# Altium PCB Controller-Board-Rev2_Panelized.PcbDoc (part 2 of 2)
Units mm, origin at the board's own origin, x right, y up, seen from the top; angles counter-clockwise.
Board outline 31 x 50 mm, 4 copper layers (Top Layer, Mid Layer 1, Mid Layer 2, Bottom Layer), stack 1.56 mm thick; 94 components, 55 nets, 446 pads, 226 vias.
Unrouted connection lines stored in the file: 54.
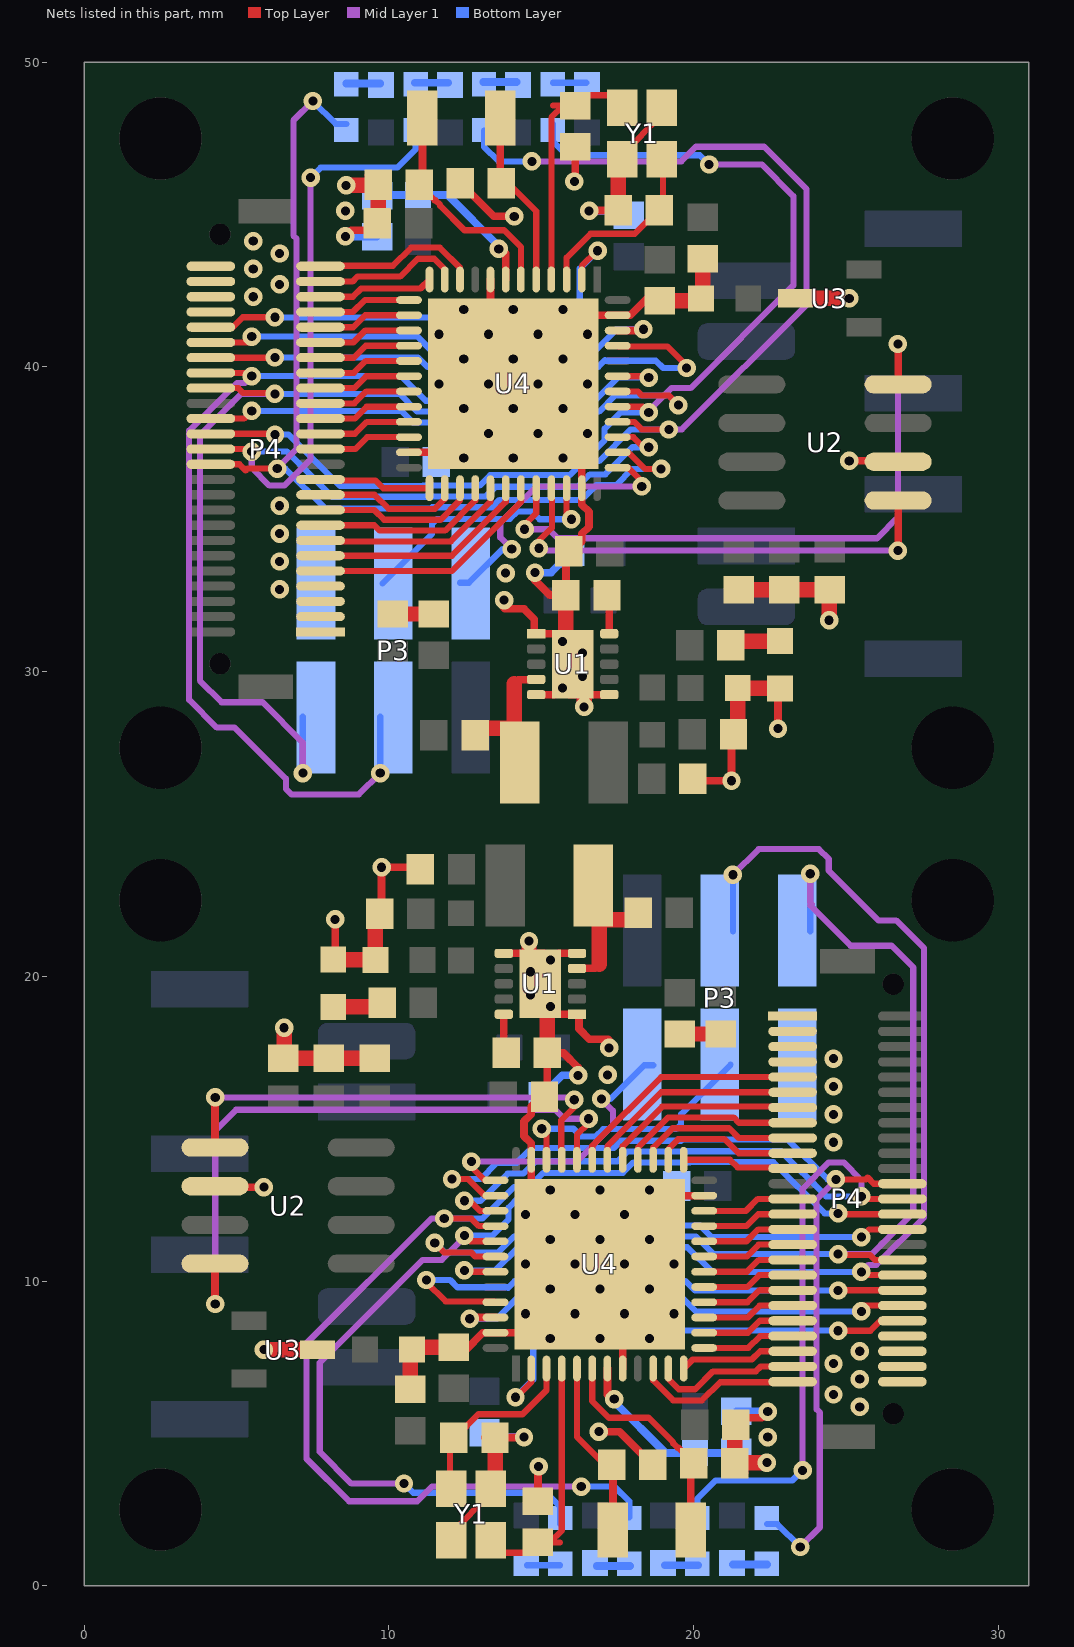
[diagram p4: the nets of this part, all layers, seen from the top]

## Via types
v1: diameter 0.605, hole 0.3, Top Layer to Bottom Layer, tented both sides, 174 vias
v2: diameter 0.605, hole 0.3, Top Layer to Bottom Layer, tented bottom, 52 vias

## Nets (pads, with @x,y where several pads share a name; then routed paths per layer and width w, separated by ;. In a path a pad name is that pad's centre, name@x,y a point inside that pad or via, vN(x,y) a via of type N, cw(c..) or ccw(c..) an arc to the next point about the centre after c; other vN are vias at no path point) (continued)
GND: C2.1 C3.1 C4.1 C5.1 C6.2 C7.1 C8.1 C9.1 C11.1 C12.1 C13.1 C14.1 C15.1 C16.1 C17.1 C18.1 C19.1 C20.1 C21.1 C22.1 P3.3 P4.1 P4.2 P4.3 P4.4 P4.26 P4.27 P4.28 P4.29 R3.1 R4.1 R10.1 U1.1 U1.5 U1.6 U1.11 U2.2 U3.1 U4. U4.8 U4.23 U4.35 U4.47 Y1.2 Y1.4 | length 113.7
  Top Layer w0.203: Y1.2@11.713,1.486 Y1.2@11.713,1.727 ; Y1.2@12.043,1.727 Y1.4@13.343,3.027 ; Y1.4@17.657,46.973 Y1.2@18.957,48.273 ; Y1.2@19.287,48.273 Y1.2@19.287,48.514
  Top Layer w0.254: U2.2@4.319,13.081 v1(5.896,13.081) ; R4.1@8.232,20.546 v1(8.232,21.869) ; v1@8.568,44.286 8.771,44.488 9.264,44.488 9.621,44.844 C19.1@9.621,44.883 ; C14.1@9.328,46.295 C14.1@9.661,46.295 ; R3.1@9.566,20.546 R3.1@9.653,20.633 ; C12.1@9.757,22.124 v1(9.757,23.583) 11.049,23.583 C11.1@11.05,23.581 ; U4.23@10.655,37.198 U4.@11.83,37.198 ; C18.1@12.119,7.748 12.526,7.748 13.08,8.302 U4.47@13.495,8.302 U4.@14.67,8.302 ; C13.1@12.302,46.32 12.182,46.2 12.959,45.422 13.436,44.945 v1(14.113,44.945) ; C2.1@13.15,4.863 14.126,4.863 ; U4.@13.33,40.198 U4.8@13.33,42.873 ; U1.6@13.77,20.755 15.085,20.755 v2(15.307,20.533) ; v1(13.776,32.347) 13.776,32.095 13.81,32.061 14.427,32.061 14.764,31.724 14.764,31.31 U1.1@14.83,31.245 U1.11@15.541,31.245 ; U4.@14.67,12.802 14.67,12.838 U4.35@14.67,13.977 14.67,14.52 14.433,14.756 14.433,15.238 14.67,15.475 14.67,15.73 15.194,16.254 C6.2@15.194,17.485 15.727,17.485 16.209,17.004 v1(16.209,16.75) ; v1(14.791,33.25) 14.791,32.996 15.273,32.515 C6.2@15.806,32.515 15.806,33.746 16.33,34.27 16.33,34.525 16.567,34.762 16.567,35.244 16.33,35.48 U4.35@16.33,36.023 16.33,37.162 U4.@16.33,37.198 ; U1.5@14.83,29.245 U1.11@15.421,29.245 ; C3.1@14.888,2.769 v1@14.888,4.05 ; U1.11@15.459,18.755 U1.1@16.17,18.755 16.236,18.69 16.236,18.276 16.573,17.939 17.19,17.939 17.224,17.905 v1(17.224,17.653) ; U1.11@15.579,20.755 U1.5@16.17,20.755 ; v2(15.693,29.467) 15.915,29.245 U1.6@17.23,29.245 ; v1@16.112,45.95 C3.1@16.112,47.231 ; U4.@16.33,41.698 U4.47@17.505,41.698 17.92,41.698 18.474,42.252 C18.1@18.881,42.252 ; 16.874,45.137 C2.1@17.85,45.137 ; v1(16.887,5.055) 17.564,5.055 18.041,4.578 18.818,3.8 C13.1@18.698,3.68 ; U4.8@17.67,7.127 U4.@17.67,9.802 ; U4.@19.17,12.802 U4.23@20.345,12.802 ; C11.1@19.95,26.419 19.951,26.417 v1(21.243,26.417) C12.1@21.243,27.876 ; C14.1@21.339,3.705 C14.1@21.672,3.705 ; R3.1@21.347,29.367 R3.1@21.434,29.454 ; C19.1@21.379,5.117 21.379,5.156 21.736,5.512 22.229,5.512 v1(22.431,5.715) ; v1(22.768,28.131) R4.1@22.768,29.454 ; v1(25.104,36.919) U2.2@26.681,36.919
  Top Layer w0.508: v1(5.896,7.747) U3.1@7.656,7.747 ; C9.1@6.531,17.312 C8.1@8.029,17.312 C7.1@9.528,17.312 ; C9.1@6.556,17.337 v1(6.556,18.313) ; R4.1@8.232,20.546 R3.1@9.54,20.546 ; v1(8.594,45.961) C14.1@9.62,45.961 ; R3.1@9.553,20.533 C12.1@9.553,21.92 ; C19.1@9.646,44.87 C14.1@9.646,45.987 ; C5.1@10.118,31.893 C4.1@11.464,31.893 ; C17.1@10.696,6.441 R10.1@10.697,7.76 ; R10.1@10.761,7.824 C18.1@12.119,7.824 ; Y1.4@13.48,3.323 C2.1@13.48,4.863 ; v1(14.595,21.158) 14.595,20.244 U1.11@15.027,19.812 ; C6.2@15.194,17.485 U1.11@15.194,19.531 ; U1.11@15.806,30.469 C6.2@15.806,32.515 ; U1.11@15.973,30.188 16.405,29.756 v1(16.405,28.842) ; C2.1@17.52,45.137 Y1.4@17.52,46.677 ; C18.1@18.881,42.176 R10.1@20.239,42.176 ; C4.1@19.536,18.107 C5.1@20.882,18.107 ; R10.1@20.303,42.24 C17.1@20.303,43.559 ; C14.1@21.354,4.013 C19.1@21.354,5.13 ; C14.1@21.38,4.039 v1(22.406,4.039) ; C12.1@21.447,28.08 R3.1@21.447,29.467 ; R3.1@21.46,29.454 R4.1@22.768,29.454 ; C7.1@21.472,32.688 C8.1@22.971,32.688 C9.1@24.469,32.688 ; U3.1@23.344,42.253 v1(25.104,42.253) ; v1(24.444,31.687) C9.1@24.444,32.663
  Bottom Layer w0.254: v1@8.568,44.286 C15.1@9.595,44.286 ; C20.1@11.682,37.009 v2(12.455,37.009) ; C22.1@13.273,4.888 13.284,4.877 v1(14.43,4.877) ; v1(14.791,33.25) 15.314,33.25 15.577,33.513 15.577,33.961 C21.1@16.021,33.961 ; C21.1@14.979,16.039 15.423,16.039 15.423,16.487 15.686,16.75 v1(16.209,16.75) ; v1(16.57,45.123) 17.716,45.123 C22.1@17.727,45.112 ; v2(18.545,12.991) C20.1@19.318,12.991 ; C15.1@21.405,5.714 v1(22.431,5.715)
  other v1: 14.913,3.912 22.431,4.877 25.454,5.867 24.59,6.274 25.454,6.782 24.59,7.29 25.454,7.696 16.92,12.991 24.59,14.554 24.59,15.469 24.59,16.383 17.173,16.764 24.59,17.297 6.41,32.703 13.827,33.236 6.41,33.617 6.41,34.531 6.41,35.446 14.08,37.009 5.546,42.304 6.41,42.71 5.546,43.218 6.41,43.726 5.546,44.133 8.569,44.285 8.569,45.123 16.087,46.088
  other v2: 15.294,8.114 16.92,8.114 18.545,8.114 14.481,8.927 16.107,8.927 17.733,8.927 19.358,8.927 15.294,9.74 16.92,9.74 18.545,9.74 14.481,10.552 16.107,10.552 17.733,10.552 19.358,10.552 15.294,11.365 16.92,11.365 18.545,11.365 14.481,12.178 16.107,12.178 17.733,12.178 15.294,12.991 15.307,19.009 14.646,19.39 14.646,20.152 16.354,29.848 16.354,30.61 15.693,30.991 15.706,37.009 13.267,37.822 14.893,37.822 16.519,37.822 12.455,38.635 14.08,38.635 15.706,38.635 11.642,39.448 13.267,39.448 14.893,39.448 16.519,39.448 12.455,40.26 14.08,40.26 15.706,40.26 11.642,41.073 13.267,41.073 14.893,41.073 16.519,41.073 12.455,41.886 14.08,41.886 15.706,41.886
NetC10_1: C10.1 R4.2 | length 2.9
  Top Layer w0.508: R4.2@8.169,18.996 C10.1@9.64,18.996 ; C10.1@21.36,31.004 R4.2@22.831,31.004
NetD1_1: D1.1 R6.1 | length 2.2
  Bottom Layer w0.203: R6.1@14.526,0.672 D1.1@15.617,0.672 ; D1.1@15.383,49.328 R6.1@16.474,49.328
NetD2_1: D2.1 R7.1 | length 2.2
  Bottom Layer w0.254: D2.1@13.09,49.353 R7.1@14.182,49.353 ; R7.1@16.818,0.647 D2.1@17.91,0.647
NetD3_1: D3.1 R8.1 | length 2.2
  Bottom Layer w0.254: D3.1@10.855,49.328 R8.1@11.947,49.328 ; R8.1@19.053,0.672 D3.1@20.145,0.672
NetD4_1: D4.1 R9.1 | length 2.2
  Bottom Layer w0.254: D4.1@8.594,49.302 R9.1@9.712,49.302 ; R9.1@21.288,0.698 D4.1@22.406,0.698
NRST: C15.2 R5.1 U4.7 | length 11.3
  Top Layer w0.254: U4.7@13.83,42.873 v1@13.83,43.736 ; v1@17.17,6.264 U4.7@17.17,7.127
  Bottom Layer w0.254: C15.2@9.61,45.621 9.634,45.645 R5.1@10.956,45.645 11.926,45.645 13.605,43.966 v1(13.605,43.879) ; v1(17.395,6.121) 17.395,6.034 19.074,4.355 R5.1@20.044,4.355 21.366,4.355 C15.2@21.39,4.379
PA0: P4.25 U4.10 | length 11
  Top Layer w0.203: P4.25@7.752,43.306 7.767,43.321 10.131,43.321 10.727,43.918 11.667,43.918 12.33,43.255 U4.10@12.33,42.873 ; U4.10@18.67,7.127 18.67,6.745 19.333,6.082 20.273,6.082 20.87,6.679 23.233,6.679 P4.25@23.248,6.694
PA1: P4.24 U4.11 | length 9.7
  Top Layer w0.203: P4.24@7.752,42.806 8.803,42.806 8.962,42.966 10.365,42.966 10.951,43.552 11.487,43.552 11.83,43.209 U4.11@11.83,42.873 ; U4.11@19.17,7.127 19.17,6.791 19.513,6.448 20.049,6.448 20.635,7.035 22.038,7.035 22.197,7.194 P4.24@23.248,7.194
PA2/USART2_TX: P4.23 U4.12 | length 7.6
  Top Layer w0.203: P4.23@7.752,42.306 8.816,42.306 9.086,42.577 11.034,42.577 U4.12@11.33,42.873 ; U4.12@19.67,7.127 19.966,7.423 21.914,7.423 22.184,7.694 P4.23@23.248,7.694
PA3/USART2_RX: P4.22 U4.13 | length 6.1
  Top Layer w0.203: P4.22@7.752,41.806 8.819,41.806 9.21,42.198 U4.13@10.655,42.198 ; U4.13@20.345,7.802 21.79,7.802 22.181,8.194 P4.22@23.248,8.194
PA4/SPI1_NSS: P4.21 U4.14 | length 6.1
  Top Layer w0.203: P4.21@7.752,41.306 8.827,41.306 9.218,41.698 U4.14@10.655,41.698 ; U4.14@20.345,8.302 21.782,8.302 22.173,8.694 P4.21@23.248,8.694
PA5/SPI1_SCK: P4.20 U4.15 | length 6.1
  Top Layer w0.203: P4.20@7.752,40.806 8.835,40.806 9.226,41.198 U4.15@10.655,41.198 ; U4.15@20.345,8.802 21.774,8.802 22.165,9.194 P4.20@23.248,9.194
PA6/SPI1_MISO: P4.19 U4.16 | length 6.1
  Top Layer w0.203: P4.19@7.752,40.306 8.843,40.306 9.234,40.698 U4.16@10.655,40.698 ; U4.16@20.345,9.302 21.766,9.302 22.157,9.694 P4.19@23.248,9.694
PA7/SPI1_MOSI: P4.18 U4.17 | length 6.1
  Top Layer w0.203: P4.18@7.752,39.806 8.851,39.806 9.242,40.198 U4.17@10.655,40.198 ; U4.17@20.345,9.802 21.758,9.802 22.149,10.194 P4.18@23.248,10.194
PA8: P4.7 U4.29 | length 13.2
  Top Layer w0.203: P4.7@7.752,34.306 7.781,34.277 12.034,34.277 13.33,35.573 U4.29@13.33,36.023 ; U4.29@17.67,13.977 17.67,14.427 18.966,15.723 23.219,15.723 P4.7@23.248,15.694
PA9: P4.6 U4.30 | length 14.5
  Top Layer w0.203: P4.6@7.752,33.806 12.066,33.806 13.83,35.571 U4.30@13.83,36.023 ; U4.30@17.17,13.977 17.17,14.429 18.934,16.194 P4.6@23.248,16.194
PA10: P4.5 U4.31 | length 15.9
  Top Layer w0.203: P4.5@7.752,33.306 12.069,33.306 14.33,35.568 U4.31@14.33,36.023 ; U4.31@16.67,13.977 16.67,14.432 18.931,16.694 P4.5@23.248,16.694
PA11/CAN_RX: U2.4 U4.32 | length 42.4
  Top Layer w0.203: v1(14.449,34.675) 14.449,34.824 14.83,35.205 U4.32@14.83,36.023 ; U4.32@16.17,13.977 16.17,14.795 16.551,15.177 v1(16.551,15.325)
  Top Layer w0.254: v1@4.289,9.246 U2.4@4.289,10.571 ; U2.4@26.711,39.429 v1@26.711,40.754
  Mid Layer 1 w0.203: v1(4.295,9.246) 4.295,14.935 4.981,15.621 15.463,15.621 15.759,15.325 v1(16.551,15.325) ; v1(14.449,34.675) 15.241,34.675 15.537,34.379 26.019,34.379 26.705,35.065 v1(26.705,40.754)
PA12/CAN_TX: U2.1 U4.33 | length 30.9
  Top Layer w0.203: v1(14.919,34.049) 14.919,34.292 15.348,34.721 15.348,36.005 U4.33@15.33,36.023 ; U4.33@15.67,13.977 15.652,13.995 15.652,15.279 16.081,15.708 v1(16.081,15.951)
  Top Layer w0.254: U2.1@4.289,14.381 v1@4.289,15.818 ; v1@26.711,34.182 U2.1@26.711,35.619
  Mid Layer 1 w0.203: v1(4.295,16.027) 16.017,16.027 16.005,16.015 16.069,15.951 v1(16.081,15.951) ; v1(14.919,34.049) 14.931,34.049 14.995,33.985 14.983,33.973 v1(26.705,33.973)
PA13/SWDIO: P3.2 U4.34 | length 16.7
  Top Layer w0.203: U4.34@15.17,13.977 v1@15.17,14.842 ; v1@15.83,35.158 U4.34@15.83,36.023
  Bottom Layer w0.203: P3.2@9.788,32.896 11.414,34.522 11.414,34.852 11.577,35.015 13.967,35.015 14.208,35.257 14.69,35.257 14.944,35.003 v1(15.985,35.003) ; v1(15.015,14.997) 16.056,14.997 16.31,14.743 16.792,14.743 17.033,14.985 19.423,14.985 19.586,15.148 19.586,15.478 P3.2@21.212,17.104
PA14/SWCLK: P3.1 U4.37 | length 18.9
  Top Layer w0.203: v1(12.703,13.919) 12.703,13.748 13.149,13.302 U4.37@13.495,13.302 ; U4.37@17.505,36.698 17.851,36.698 18.297,36.252 v1(18.297,36.081)
  Mid Layer 1 w0.203: v1(12.703,13.919) 16.157,13.919 17.351,15.113 17.351,15.596 v1(16.97,15.977) ; v1(14.03,34.023) 13.649,34.404 13.649,34.887 14.843,36.081 v1(18.297,36.081)
  Bottom Layer w0.203: P3.1@12.328,32.921 12.623,32.921 13.725,34.023 v1(14.03,34.023) ; v1(16.97,15.977) 17.275,15.977 18.377,17.079 P3.1@18.672,17.079
PA15: D4.2 P4.39 U4.38 | length 63.4
  Top Layer w0.203: P4.39@4.152,36.806 5.089,36.806 5.292,36.603 5.354,36.665 v1(6.334,36.665) ; v1(12.068,13.346) 12.602,13.346 13.146,12.802 U4.38@13.495,12.802 ; U4.38@17.505,37.198 17.854,37.198 18.398,36.654 v1(18.932,36.654) ; v1(24.666,13.335) 25.646,13.335 25.708,13.397 25.911,13.194 P4.39@26.848,13.194
  Mid Layer 1 w0.203: v1(6.334,36.665) 6.308,36.665 6.966,37.323 6.966,44.211 6.863,44.315 6.863,48.09 v1(7.502,48.73) ; v1(23.498,1.27) 24.137,1.91 24.137,5.685 24.034,5.789 24.034,12.677 24.692,13.335 v1(24.666,13.335)
  Bottom Layer w0.203: v1(6.334,36.665) 6.601,36.665 7.908,35.358 11.381,35.358 11.42,35.396 13.382,35.396 13.623,35.638 14.848,35.638 16.325,35.638 16.808,36.12 17.456,36.12 ; v1(7.502,48.73) 8.252,47.98 D4.2@8.594,47.98 ; v1(12.068,13.346) 13.008,13.346 13.544,13.882 ; 13.544,13.88 14.192,13.88 14.675,14.362 16.152,14.362 17.377,14.362 17.618,14.604 19.58,14.604 19.619,14.642 23.092,14.642 24.399,13.335 v1(24.666,13.335) ; 17.456,36.118 17.992,36.654 v1(18.932,36.654) ; D4.2@22.406,2.02 22.748,2.02 v1(23.498,1.27)
PB0: P4.17 U4.18 | length 6.1
  Top Layer w0.203: P4.17@7.752,39.306 8.859,39.306 9.25,39.698 U4.18@10.655,39.698 ; U4.18@20.345,10.302 21.75,10.302 22.141,10.694 P4.17@23.248,10.694
PB1: P4.16 U4.19 | length 6.1
  Top Layer w0.203: P4.16@7.752,38.806 8.867,38.806 9.258,39.198 U4.19@10.655,39.198 ; U4.19@20.345,10.802 21.742,10.802 22.133,11.194 P4.16@23.248,11.194
PB2: P4.15 U4.20 | length 6.1
  Top Layer w0.203: P4.15@7.752,38.306 8.875,38.306 9.266,38.698 U4.20@10.655,38.698 ; U4.20@20.345,11.302 21.734,11.302 22.125,11.694 P4.15@23.248,11.694
PB3: D3.2 P4.38 U4.39 | length 67.4
  Top Layer w0.203: P4.38@4.152,37.306 v1@5.401,37.306 ; v1(12.475,12.635) 12.653,12.635 12.985,12.302 U4.39@13.495,12.302 ; U4.39@17.505,37.698 18.015,37.698 18.347,37.365 v1(18.525,37.365) ; v1@25.599,12.694 P4.38@26.848,12.694
  Mid Layer 1 w0.203: v1(5.496,37.224) 5.496,36.69 6.077,36.109 6.564,36.109 7.426,36.97 v1(7.426,46.215) ; v1(23.574,3.785) 23.574,13.03 24.436,13.891 24.923,13.891 25.504,13.31 v1(25.504,12.776)
  Bottom Layer w0.203: v1(5.496,37.224) 5.498,37.221 6.654,37.221 8.137,35.739 11.26,35.739 11.272,35.752 13.179,35.752 13.496,36.069 16.188,36.069 16.595,36.476 17.103,36.476 17.992,37.365 v1(18.525,37.365) ; v1(7.426,46.215) 7.756,46.546 10.274,46.546 10.88,47.152 D3.2@10.88,47.98 ; v1(12.475,12.635) 13.008,12.635 13.897,13.524 14.405,13.524 14.812,13.931 17.504,13.931 17.821,14.248 19.728,14.248 19.74,14.261 22.863,14.261 24.346,12.779 25.502,12.779 v1(25.504,12.776) ; D3.2@20.12,2.02 20.12,2.848 20.726,3.454 23.244,3.454 v1(23.574,3.785)
PB4: D2.2 P4.37 U4.40 | length 81
  Top Layer w0.203: P4.37@4.152,37.806 v1@6.197,37.806 ; v1(11.814,12.051) 11.718,12.051 11.715,12.049 12.705,12.049 12.951,11.802 U4.40@13.495,11.802 ; U4.40@17.505,38.198 18.049,38.198 18.295,37.951 19.285,37.951 19.282,37.949 v1(19.186,37.949) ; v1@24.803,12.194 P4.37@26.848,12.194
  Mid Layer 1 w0.203: v1(11.814,12.051) 11.393,12.051 7.293,7.95 7.293,4.166 8.69,2.769 10.925,2.769 11.407,3.251 v1(16.31,3.251) ; v1(14.69,46.749) 19.593,46.749 20.075,47.231 22.31,47.231 23.707,45.834 23.707,42.05 19.607,37.949 v1(19.186,37.949)
  Bottom Layer w0.203: v1(6.258,37.783) 6.703,37.783 8.391,36.095 11.112,36.095 11.125,36.108 12.975,36.108 13.321,36.453 15.936,36.453 16.393,36.91 16.896,36.91 17.935,37.949 v1(19.186,37.949) ; v1(11.814,12.051) 13.065,12.051 14.104,13.09 14.607,13.09 15.064,13.547 17.679,13.547 18.025,13.892 19.875,13.892 19.888,13.905 22.609,13.905 24.297,12.217 v1(24.742,12.217) ; D2.2@13.116,47.751 13.116,47.231 13.598,46.749 v1(14.69,46.749) ; v1(16.31,3.251) 17.402,3.251 17.884,2.769 D2.2@17.884,2.249
PB5: D1.2 P4.36 U4.41 | length 71.3
  Top Layer w0.203: P4.36@4.152,38.306 5.242,38.306 v1(5.495,38.559) ; v1@12.665,11.302 U4.41@13.495,11.302 ; U4.41@17.505,38.698 v1@18.335,38.698 ; v1(25.505,11.441) 25.758,11.694 P4.36@26.848,11.694
  Mid Layer 1 w0.203: v1(10.493,3.353) 8.766,3.353 7.724,4.394 7.724,7.315 11.103,10.694 11.73,10.694 v1@12.475,11.438 ; v1@18.525,38.562 19.27,39.306 19.897,39.306 23.276,42.685 23.276,45.606 22.234,46.647 v1(20.507,46.647)
  Bottom Layer w0.203: v1(5.495,38.559) 10.402,38.559 10.781,38.18 11.62,38.18 12.077,37.723 12.58,37.723 13.037,37.266 13.498,37.266 13.798,37.566 14.311,37.566 14.611,37.266 15.123,37.266 15.423,37.566 15.936,37.566 16.236,37.266 16.749,37.266 17.075,37.592 17.075,37.972 17.611,38.508 v1(18.525,38.508) ; v1(10.493,3.353) 10.798,3.048 15.16,3.048 15.624,2.584 D1.2@15.624,2.02 ; v1(12.475,11.492) 13.389,11.492 13.925,12.028 13.925,12.408 14.251,12.734 14.764,12.734 15.064,12.434 15.577,12.434 15.877,12.734 16.389,12.734 16.689,12.434 17.202,12.434 17.502,12.734 17.963,12.734 18.42,12.277 18.923,12.277 19.38,11.82 20.219,11.82 20.598,11.441 v1(25.505,11.441) ; D1.2@15.376,47.98 15.376,47.416 15.84,46.952 20.202,46.952 v1(20.507,46.647)
PB6/USART1_TX: P3.6 P4.34 U4.42 | length 74.5
  Top Layer w0.203: P4.34@4.152,39.306 5.053,39.306 5.214,39.145 v1@6.229,39.145 ; v1(11.5,11.25) 11.814,10.936 12.7,10.936 12.834,10.802 U4.42@13.495,10.802 ; U4.42@17.505,39.198 18.166,39.198 18.3,39.064 19.186,39.064 v1(19.5,38.75) ; v1@24.771,10.855 25.786,10.855 25.947,10.694 P4.34@26.848,10.694
  Mid Layer 1 w0.203: v1(6.257,39.117) 5.154,39.117 3.794,37.757 3.794,29.705 4.505,28.994 5.851,28.994 7.172,27.673 v1(7.172,26.67) ; v1(23.828,23.368) 23.828,22.423 23.876,22.375 23.828,22.327 25.149,21.006 26.495,21.006 27.206,20.295 27.206,12.243 25.846,10.883 v1(24.743,10.883)
  Bottom Layer w0.203: v1(6.257,39.117) 10.346,39.117 10.928,38.536 11.767,38.536 12.224,38.078 12.685,38.078 12.985,38.378 13.55,38.378 13.85,38.078 14.311,38.078 14.611,38.378 15.175,38.378 15.475,38.078 15.936,38.078 16.393,38.536 16.896,38.536 17.427,39.067 19.16,39.067 19.477,38.75 v1(19.5,38.75) ; v1(7.172,26.67) P3.6@7.172,28.521 ; v1(11.5,11.25) 11.523,11.25 11.84,10.933 13.573,10.933 14.104,11.464 14.607,11.464 15.064,11.922 15.525,11.922 15.825,11.622 16.389,11.622 16.689,11.922 17.15,11.922 17.45,11.622 18.015,11.622 18.315,11.922 18.776,11.922 19.233,11.464 20.072,11.464 20.654,10.883 v1(24.743,10.883) ; P3.6@23.828,21.479 v1(23.828,23.368)
PB7/USART1_RX: P3.5 P4.33 U4.43 | length 76.5
  Top Layer w0.203: P4.33@4.152,39.806 v1@5.34,39.806 ; v1(12.475,10.349) 12.522,10.302 U4.43@13.495,10.302 ; U4.43@17.505,39.698 18.478,39.698 v1(18.525,39.651) ; v1@25.66,10.194 P4.33@26.848,10.194
  Mid Layer 1 w0.203: v1(5.495,39.702) 5.266,39.473 5.007,39.473 3.438,37.904 3.438,29.08 4.354,28.164 4.934,28.164 6.616,26.483 6.616,26.15 6.796,25.97 9.012,25.97 v1(9.712,26.67) ; v1(21.288,23.336) 22.13,24.178 24.106,24.178 24.432,23.852 24.432,23.469 26.066,21.836 26.646,21.836 27.562,20.92 27.562,12.096 25.993,10.527 25.734,10.527 v1(25.505,10.298)
  Bottom Layer w0.203: v1(5.495,39.702) 10.397,39.702 11.208,38.891 11.872,38.891 12.172,39.191 12.685,39.191 12.985,38.891 13.498,38.891 13.798,39.191 14.311,39.191 14.611,38.891 15.123,38.891 15.423,39.191 15.988,39.191 16.288,38.891 16.749,38.891 17.509,39.651 v1(18.525,39.651) ; P3.5@9.712,26.664 P3.5@9.712,28.521 ; v1(12.475,10.349) 13.491,10.349 14.251,11.109 14.712,11.109 15.012,10.809 15.577,10.809 15.877,11.109 16.389,11.109 16.689,10.809 17.202,10.809 17.502,11.109 18.015,11.109 18.315,10.809 18.828,10.809 19.128,11.109 19.792,11.109 20.603,10.298 v1(25.505,10.298) ; P3.5@21.288,21.479 v1(21.288,23.336)
PB8/I2C1_SCL: P4.32 U4.45 | length 38.6
  Top Layer w0.203: P4.32@4.152,40.306 v1@6.252,40.306 ; v1(11.23,10.033) 11.23,9.957 11.856,9.331 13.466,9.331 U4.45@13.495,9.302 ; U4.45@17.505,40.698 17.534,40.669 19.144,40.669 19.77,40.043 v1(19.77,39.967) ; v1@24.748,9.694 P4.32@26.848,9.694
  Bottom Layer w0.203: v1(6.257,40.311) 10.956,40.311 11.263,40.004 11.924,40.004 12.224,39.704 12.685,39.704 12.985,40.004 13.55,40.004 13.85,39.704 14.311,39.704 14.611,40.004 15.175,40.004 15.475,39.704 15.936,39.704 16.236,40.004 16.872,40.004 17.089,40.221 17.103,40.207 18.756,40.207 18.996,39.967 v1(19.77,39.967) ; v1(11.23,10.033) 12.004,10.033 12.244,9.793 13.897,9.793 13.911,9.779 14.128,9.996 14.764,9.996 15.064,10.296 15.525,10.296 15.825,9.996 16.389,9.996 16.689,10.296 17.15,10.296 17.45,9.996 18.015,9.996 18.315,10.296 18.776,10.296 19.076,9.996 19.737,9.996 20.044,9.689 v1(24.743,9.689)
PB9/I2C1_SDA: P4.31 U4.46 | length 33.3
  Top Layer w0.203: P4.31@4.152,40.806 v1@5.533,40.806 ; v1(5.495,40.997) v1@5.647,40.997 ; v1@25.353,9.003 v1(25.505,9.003) ; v1@25.467,9.194 P4.31@26.848,9.194
  Top Layer w0.254: v1@12.701,8.802 U4.46@13.495,8.802 ; U4.46@17.505,41.198 v1@18.299,41.198
  Bottom Layer w0.203: v1@5.698,40.997 v1(5.495,40.997) 10.88,40.997 10.906,41.022 11.411,40.517 11.872,40.517 12.172,40.817 12.737,40.817 13.037,40.517 13.498,40.517 13.798,40.817 14.363,40.817 14.663,40.517 15.123,40.517 15.423,40.817 15.988,40.817 16.288,40.517 16.749,40.517 17.469,41.237 v1(18.348,41.237) ; v1(12.652,8.763) 13.531,8.763 14.251,9.483 14.712,9.483 15.012,9.183 15.577,9.183 15.877,9.483 16.337,9.483 16.637,9.183 17.202,9.183 17.502,9.483 17.963,9.483 18.263,9.183 18.828,9.183 19.128,9.483 19.589,9.483 20.094,8.978 20.12,9.003 v1(25.505,9.003) v1@25.302,9.003
PB10/USART3_TX/I2C2_SCL: P4.14 U4.21 | length 6.1
  Top Layer w0.203: P4.14@7.752,37.806 8.883,37.806 9.274,38.198 U4.21@10.655,38.198 ; U4.21@20.345,11.802 21.726,11.802 22.117,12.194 P4.14@23.248,12.194
PB11/USART3_RX/I2C2_SDA: P4.13 U4.22 | length 6.1
  Top Layer w0.203: P4.13@7.752,37.306 8.891,37.306 9.282,37.698 U4.22@10.655,37.698 ; U4.22@20.345,12.302 21.718,12.302 22.109,12.694 P4.13@23.248,12.694
PB12/SPI2_NSS: P4.11 U4.25 | length 7.2
  Top Layer w0.203: P4.11@7.836,36.273 9.559,36.273 9.809,36.023 U4.25@11.33,36.023 ; U4.25@19.67,13.977 21.191,13.977 21.441,13.727 P4.11@23.164,13.727
PB13/SPI2_SCK: P4.10 U4.26 | length 9.5
  Top Layer w0.203: P4.10@7.752,35.806 9.523,35.806 9.985,35.344 11.504,35.344 11.83,35.67 U4.26@11.83,36.023 ; U4.26@19.17,13.977 19.17,14.33 19.496,14.656 21.015,14.656 21.477,14.194 P4.10@23.248,14.194
PB14/SPI2_MISO: P4.9 U4.27 | length 10.7
  Top Layer w0.203: P4.9@7.752,35.306 9.52,35.306 9.838,34.988 11.693,34.988 12.33,35.626 U4.27@12.33,36.023 ; U4.27@18.67,13.977 18.67,14.374 19.307,15.012 21.162,15.012 21.48,14.694 P4.9@23.248,14.694
PB15/SPI2_MOSI: P4.8 U4.28 | length 11.9
  Top Layer w0.203: P4.8@7.752,34.806 9.517,34.806 9.691,34.632 11.84,34.632 12.83,35.623 U4.28@12.83,36.023 ; U4.28@18.17,13.977 18.17,14.377 19.16,15.368 21.309,15.368 21.483,15.194 P4.8@23.248,15.194
PC13: P4.30 U4.2 | length 33.2
  Top Layer w0.203: P4.30@4.152,41.306 4.874,41.306 5.2,41.632 v1(6.257,41.632) ; v1@14.171,6.184 14.67,6.682 U4.2@14.67,7.127 ; U4.2@16.33,42.873 16.33,43.318 v1@16.829,43.816 ; v1(24.743,8.368) 25.8,8.368 26.126,8.694 P4.30@26.848,8.694
  Top Layer w0.254: v1(14.151,6.184) v1@14.171,6.184 ; v1@16.829,43.816 v1(16.849,43.816)
  Bottom Layer w0.203: v1@6.259,41.63 11.872,41.63 12.172,41.33 12.737,41.33 13.037,41.63 13.498,41.63 13.798,41.33 14.363,41.33 14.663,41.63 15.123,41.63 15.423,41.33 15.475,41.33 ; v1(14.151,6.184) 14.738,6.77 14.738,8.344 15.064,8.67 15.525,8.67 ; 15.439,41.366 15.475,41.33 ; 15.561,8.634 15.525,8.67 ; v1(16.849,43.816) 16.262,43.23 16.262,41.656 15.936,41.33 15.475,41.33 ; v1@24.741,8.37 19.128,8.37 18.828,8.67 18.263,8.67 17.963,8.37 17.502,8.37 17.202,8.67 16.637,8.67 16.337,8.37 15.877,8.37 15.577,8.67 15.525,8.67
PC14/OSC32_IN: C2.2 U4.3 Y1.1 | length 12.4
  Top Layer w0.203: C2.2@11.8,4.863 C2.2@11.84,4.863 ; Y1.1@12.003,2.729 C2.2@12.003,4.543 ; C2.2@12.17,4.863 12.934,5.627 14.382,5.627 15.17,6.415 U4.3@15.17,7.127 ; U4.3@15.83,42.873 15.83,43.585 16.618,44.373 18.066,44.373 C2.2@18.83,45.137 ; C2.2@18.997,45.457 Y1.1@18.997,47.271 ; C2.2@19.16,45.137 C2.2@19.2,45.137
PC15/OSC32_OUT: C3.2 U4.4 Y1.3 | length 16
  Top Layer w0.203: Y1.3@13.722,1.078 C3.2@15.106,1.078 ; C3.2@14.888,1.419 15.61,1.419 ; C3.2@15.28,1.419 15.67,1.809 U4.4@15.67,7.127 ; U4.4@15.33,42.873 15.33,48.191 C3.2@15.72,48.581 ; 15.39,48.581 C3.2@16.112,48.581 ; C3.2@15.894,48.922 Y1.3@17.278,48.922
PF0/OSC_IN: C13.2 U4.5 Y2.1 | length 11.7
  Top Layer w0.203: C13.2@13.638,46.306 14.83,45.113 U4.5@14.83,42.873 ; U4.5@16.17,7.127 16.17,4.887 C13.2@17.362,3.694
  Top Layer w0.254: C13.2@13.638,46.356 13.648,46.367 Y2.1@13.648,48.287 ; Y2.1@17.352,1.713 17.352,3.633 C13.2@17.362,3.644
PF1/OSC_OUT: C14.2 U4.6 Y2.2 | length 14.9
  Top Layer w0.203: C14.2@10.996,45.973 11.497,45.471 11.526,45.471 11.675,45.323 11.675,45.294 12.478,44.491 13.779,44.491 14.33,43.94 U4.6@14.33,42.873 ; U4.6@16.67,7.127 16.67,6.06 17.221,5.509 18.522,5.509 19.325,4.706 19.325,4.677 19.474,4.529 19.503,4.529 C14.2@20.004,4.027
  Top Layer w0.254: C14.2@10.996,45.973 C14.2@10.996,46.28 ; C14.2@11.098,46.383 Y2.2@11.098,48.287 ; Y2.2@19.902,1.713 C14.2@19.902,3.617 ; C14.2@20.004,3.72 C14.2@20.004,4.027
SS: C6.1 U1.10 | length 2.4
  Top Layer w0.254: C6.1@13.77,17.559 U1.10@13.77,18.755 ; U1.10@17.23,31.245 C6.1@17.23,32.441
SW: C1.2 L1.1 U1.4 | length 7.2
  Top Layer w0.254: 14.106,29.597 14.24,29.731 14.816,29.731 U1.4@14.83,29.745 ; U1.4@16.17,20.255 16.184,20.269 16.76,20.269 16.894,20.403
  Top Layer w0.508: C1.2@12.825,27.916 13.053,28.145 14.106,28.145 14.106,29.597 ; 16.894,20.403 16.894,21.855 17.947,21.855 C1.2@18.175,22.084
pads on no net: P1. P2. P4. P4.12 P4.35 P4.46 U2.5 U2.8

## Polygon pours and split planes (outlines as drawn)
GND on Bottom Layer "GND" (solid, remove dead copper, pour order 42): 8.232,31.041 8.232,34.927 7.165,35.994 6.226,35.994 6.226,31.93 7.115,31.041
3V3 on Bottom Layer "3V3" (solid, remove dead copper, pour order 40): 13.319,26.645 13.319,30.328 10.779,30.328 10.779,26.645
3V3 on Bottom Layer "3V3" (solid, remove dead copper, pour order 18): 17.681,23.355 17.681,19.672 20.221,19.672 20.221,23.355
GND on Bottom Layer "GND" (solid, remove dead copper, pour order 16): 22.768,18.959 22.768,15.073 23.835,14.006 24.774,14.006 24.774,18.07 23.885,18.959
3V3 on Mid Layer 1 "3V3" (solid, remove dead copper, pour order 44): 31,25 31,50 0,50 0,25
3V3 on Mid Layer 1 "3V3" (solid, remove dead copper, pour order 8): 0,25 0,0 31,0 31,25
12V_IN on Top Layer "12V_IN" (solid, remove dead copper, pour order 38): 0.498,33.312 4.48,33.312 6.802,30.989 13.75,30.989 14.36,30.38 14.36,30.088 5.914,30.088 5.012,30.989 4.847,31.155 0.498,31.155
GND on Top Layer "GND" (solid, remove dead copper, pour order 36): 16.443,30.462 16.443,33.693 12.836,33.693 12.201,33.058 7.147,33.058 7.147,36.182 6.029,36.182 6.029,33.541 4.81,33.541 4.81,32.982 6.802,30.989 14.741,30.989 15.249,30.481
3V3 on Top Layer "3V3" (solid, remove dead copper, pour order 34): 6.029,33.312 6.029,36.055 3.222,38.862 0.498,38.862 0.498,33.312
GND on Top Layer "GND" (solid, remove dead copper, pour order 32): 0.498,39.116 5.661,39.116 10.372,43.828 10.372,49.695 0.498,49.695
3V3 on Top Layer "3V3" (solid, remove dead copper, pour order 30): 20.646,28.461 15.097,28.461 15.097,25.26 19.364,25.26 19.364,27.089 20.646,27.089
GND on Top Layer "GND" (solid, remove dead copper, pour order 28): 19.364,25.26 30.496,25.26 30.496,33.312 19.389,33.312
GND on Top Layer "GND" (solid, remove dead copper, pour order 20): 11.636,24.74 0.504,24.74 0.504,16.688 11.611,16.688
3V3 on Top Layer "3V3" (solid, remove dead copper, pour order 14): 10.354,21.539 15.903,21.539 15.903,24.74 11.636,24.74 11.636,22.911 10.354,22.911
GND on Top Layer "GND" (solid, remove dead copper, pour order 12): 30.502,10.922 25.377,10.922 20.628,6.172 20.628,0.305 30.502,0.305
3V3 on Top Layer "3V3" (solid, remove dead copper, pour order 10): 24.971,16.688 24.971,13.945 27.74,11.176 30.502,11.176 30.502,16.688
GND on Top Layer "GND" (solid, remove dead copper, pour order 6): 14.557,19.538 14.557,16.307 18.164,16.307 18.799,16.942 23.853,16.942 23.853,13.818 24.971,13.818 24.971,16.459 26.19,16.459 26.19,17.018 24.198,19.011 16.259,19.011 15.751,19.519
12V_IN on Top Layer "12V_IN" (solid, remove dead copper, pour order 2): 30.502,16.688 26.52,16.688 24.198,19.011 17.25,19.011 16.64,19.62 16.64,19.912 25.086,19.912 25.988,19.011 26.153,18.845 30.502,18.845
GND on Mid Layer 2 (split plane): 30.49,0.51 0.51,0.51 0.51,49.49 30.49,49.49

## Keep-outs
Keep-Out Layer:
  rectangle: 0,24.6 0.61,25.4
  rectangle: 29.921,24.587 31.001,25.4
  lines w0.254: 0,0 31,0 31,50 0,50 0,0
  lines w0.8: 0.483,25 11.728,25 ; 18.72,24.994 30.188,24.994

## Other copper
Top Layer:
  region net 12V_IN: 4.888,32.704 3.438,32.704 3.438,31.433 4.888,31.433
  region net GND: 8.552,32.818 6.892,32.818 6.892,31.433 8.552,31.433
  region net 3V3: 5.864,36.335 3.362,36.335 3.362,33.706 5.864,33.706
  region net GND: 5.038,43.468 3.343,43.468 3.343,41.872 5.038,41.872
  rectangle net GND: 25.962,6.532 27.657,8.128
  rectangle net 3V3: 25.136,13.665 27.638,16.294
  rectangle net GND: 22.448,17.182 24.108,18.567
  rectangle net 12V_IN: 26.112,17.296 27.562,18.567
  pour cut-out: 11.728,25.563 11.735,24.435 18.237,24.435 19.366,25.563
Mid Layer 1:
  pour cut-out: 11.761,25.557 11.728,25.525 11.728,24.437 11.735,24.43 19.126,24.43 19.126,25.557 19.12,25.563 11.728,25.563

## Silkscreen, mask and mechanical layers (free items; w line width, h text height)
Bottom Overlay:
  text "CAN IN" at 19.11,47.079 h0.8 r180
  text "MSXII-Controller-Board / Aleksa, Kevin / 2017/01/19 / Rev 2.1" at 5.588,45.72 h0.8 r90
  text "GND" at 5.94,36.073 h0.8 r180
  text "DIO" at 8.893,36.07 h0.8 r180
  text "CLK" at 11.485,36.049 h0.8 r180
  text "CAN OUT" at 18.221,28.537 h0.8 r180
  text "TX" at 6.858,26.416 h0.8 r180
  text "RX" at 9.398,26.416 h0.8 r180
  text "3V3" at 11.684,26.416 h0.8 r180
  text "3V3" at 19.304,23.622 h0.8
  text "RX" at 21.59,23.622 h0.8
  text "TX" at 24.13,23.622 h0.8
  text "CAN OUT" at 12.779,21.463 h0.8
  text "CLK" at 19.515,13.951 h0.8
  text "DIO" at 22.107,13.93 h0.8
  text "GND" at 25.06,13.927 h0.8
  text "MSXII-Controller-Board / Aleksa, Kevin / 2017/01/19 / Rev 2.1" at 25.4,4.318 h0.8 r270
  text "CAN IN" at 11.89,2.921 h0.8